# Altium PCB DUTBoard_NO_CAPS_2.PcbDoc (part 2 of 5)
Units mil, origin at the board's own origin, x right, y up, seen from the top; angles counter-clockwise.
Board outline 5475 x 5475 mil, 4 copper layers (Top Layer, Mid-Layer 1, Mid-Layer 2, Bottom Layer); 57 components, 471 nets, 1641 pads, 1025 vias.
Unrouted connection lines stored in the file: 1.
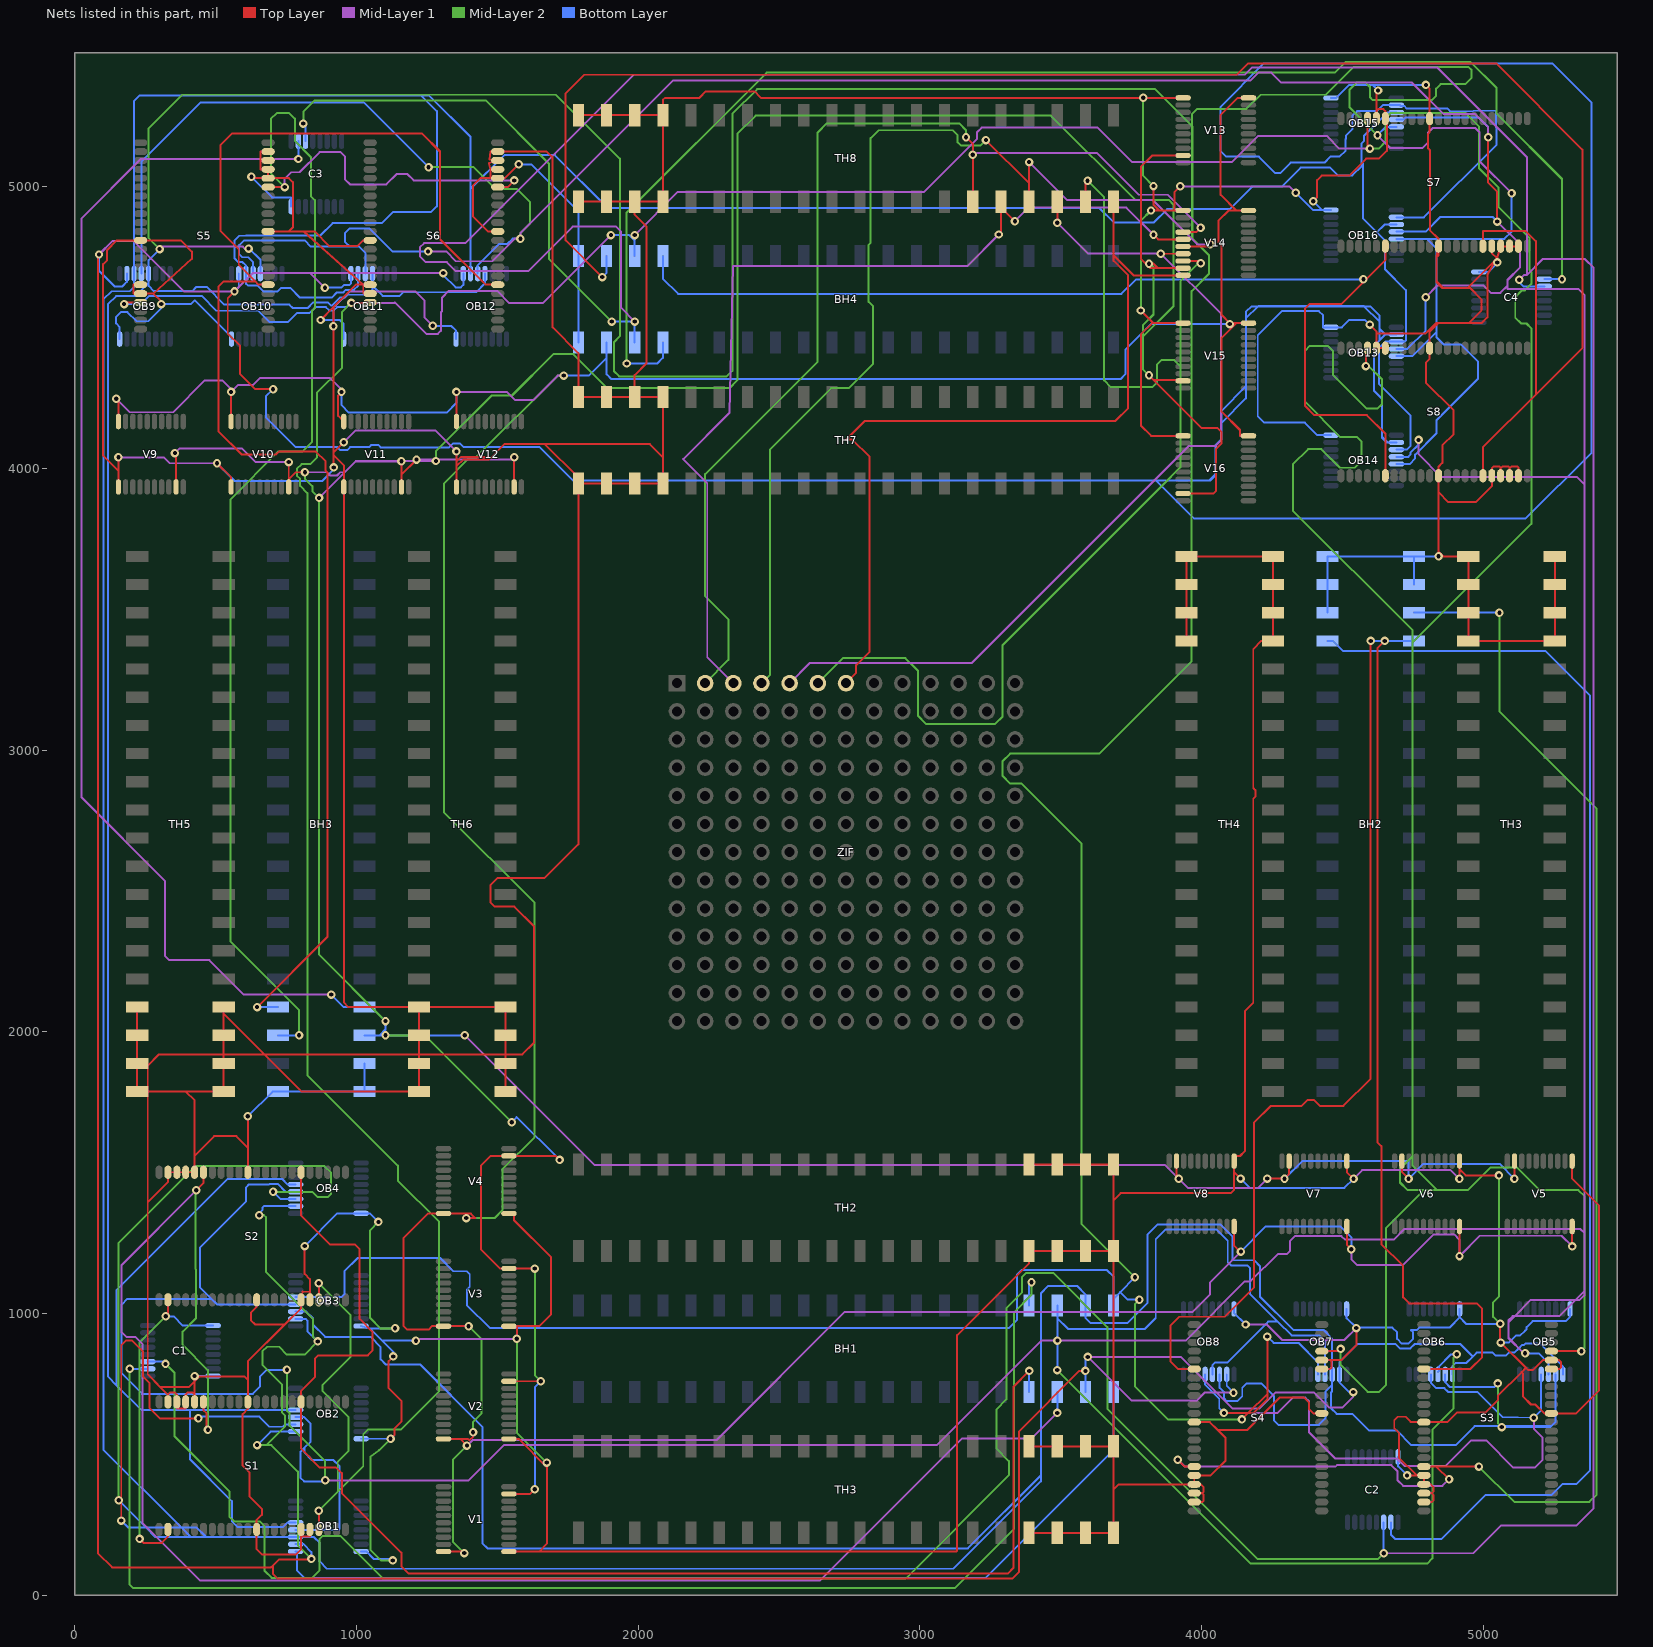
[diagram p4: the nets of this part, all layers, seen from the top]

## Via types
v1: diameter 30, hole 15, Top Layer to Bottom Layer, 1025 vias

## Nets (pads, with @x,y where several pads share a name; then routed paths per layer and width w, separated by ;. In a path a pad name is that pad's centre, name@x,y a point inside that pad or via, vN(x,y) a via of type N, cw(c..) or ccw(c..) an arc to the next point about the centre after c; other vN are vias at no path point) (continued)
ADDRD_B11: C1.ADDR11 S1.ADDR11 S2.ADDR11 | length 1213.7
  Top Layer w7: v1(230,200) 244,186 308.79,186 330.79,208 S1.ADDR11@330.79,233.62 ; v1(322.79,990) 330.79,998 S2.ADDR11@330.79,1048.62
  Mid-Layer 2 w7: v1(230,200) 230,897.21 v1(322.79,990)
  Bottom Layer w7: v1(322.79,990) 351.07,990 384,957.07 C1.ADDR11@491.14,957.07
CLK_1: BH4.17 C4.~CLK | length 4912.7
  Mid-Layer 2 w7: v1(1959,4372) 1959,4908 2455.5,5404.5 4472.84,5404.5 4510.34,5442 4955,5442 5047,5350 5047,5259 5279,5027 v1(5279,4671)
  Bottom Layer w7: v1(1959,4372) 2067.5,4372 2087.5,4392 BH4.17@2087.5,4446.46 ; C4.~CLK@5216.14,4671.48 5278.52,4671.48 v1(5279,4671)
CLK_2: BH3.17 C3.~CLK | length 4444.1
  Mid-Layer 1 w7: v1(794,5098) 235,5098 24.5,4887.5 24.5,2831.5 320,2536 320,2270 336,2254 478,2254 600,2132 v1(910,2132)
  Bottom Layer w7: C3.~CLK@793.52,5161.14 793.52,5098.48 v1(794,5098) ; v1(910,2132) 954.5,2087.5 BH3.17@1028.54,2087.5
CLK_3: BH2.17 C2.~CLK | length 4621.3
  Bottom Layer w7: BH2.17@4446.46,3387.5 4466,3387.5 4501.5,3352 5220,3352 5379,3193 5379,444 5329,394 5280,394 5241,355 5007,355 4851,199 4688,199 4671.48,215.52 C2.~CLK@4671.48,258.86
CLK_4: BH1.17 C1.~CLK | length 5047.8
  Mid-Layer 2 w7: v1(195,803.52) 195,38 208,25 3123,25 3333,235 3333,1003 3396,1066 v1(3396,1111)
  Bottom Layer w7: v1(195,803.52) C1.~CLK@258.86,803.52 ; BH1.17@3387.5,1028.54 3387.5,1102.5 v1(3396,1111)
CLR_COUNTER_W_U_COUNTER_WRP1: BH4.18 C1.CLR C2.CLR C3.CLR C4.CLR | length 20200.8
  Mid-Layer 1 w7: v1(1987.5,4521) 1939,4569.5 1939,4840.5 1921.5,4858 1767,4858 1609,4700 1353,4700 1321,4732 1245,4732 1225,4752 1225,4784 1240,4799 1386.4,4799 1984.4,5397 4153,5397 4178,5422 4837,5422 5154,5105 5154,4686 ; v1(4646,149) 4964,149 5063,248 5331,248 5391,308 5391,4712 5360,4743 5211,4743 5154,4686 ; v1(5127,4669) 5144,4686 5154,4686
  Mid-Layer 2 w7: v1(322,821) 354,789 354,564 549,369 549,279 566,262 657,262 674,245 674,86 698.5,61.5 842.5,61.5 869,88 869,200 880,211 943,211 1095,59 2949,59 3316,426 3316,476 3271,521 3271,659 3307,695 3307,1019 3362,1074 3362,1128 3378,1144 3473,1144 3665,952 3665,662 4198,129 4626,129 v1(4646,149) ; v1(811.11,5223.7) 811.11,5266.11 851,5306 1459,5306 1683,5082 1683,4744 v1(1906,4521)
  Bottom Layer w7: C1.CLR@258.86,829.11 313.89,829.11 v1(322,821) ; v1(811.11,5223.7) 819.11,5215.7 C3.CLR@819.11,5161.14 ; v1(1906,4521) v1(1987.5,4521) BH4.18@1987.5,4446.46 ; C2.CLR@4645.89,258.86 4645.89,149.11 v1(4646,149) ; v1(5127,4669) 5127,4661 5128,4660 5142.11,4645.89 C4.CLR@5216.14,4645.89
EN: BH4.19 V1.EN V2.EN V3.EN V4.EN V5.EN V6.EN V7.EN V8.EN V9.EN V10.EN V11.EN V12.EN V13.EN V14.EN V15.EN V16.EN | length 16813.4
  Top Layer w7: v1(147,4247) 154.84,4239.16 V9.EN@154.84,4166.14 ; V10.EN@554.84,4166.14 v1(554.84,4271.02) ; v1(946.84,4271.02) 948,4271.02 935,4258.02 935,4185.98 V11.EN@954.84,4166.14 ; V1.EN@1308.86,154.84 1377.16,154.84 v1(1382.53,149.47) ; V2.EN@1308.86,554.84 1368.16,554.84 ; V12.EN@1354.84,4166.14 v1(1354.84,4271.02) ; v1(1389.74,1338.84) 1421.74,1338.84 1405.74,1354.84 V4.EN@1308.86,1354.84 1253,1354.84 1166,1267.84 1166,956.5 1179.5,943 1255.9,943 1267.74,954.84 V3.EN@1308.86,954.84 v1(1398,954.84) ; v1(1392,531) 1368.16,554.84 ; v1(1413.74,578.84) 1413.74,563 1400.24,549.5 1394.9,554.84 1368.16,554.84 ; v1(4100,4512) v1@4103.16,4515.16 ; V8.EN@4115.16,1308.86 4115.16,1240 4135.18,1219.98 v1(4139.16,1219.98) ; V16.EN@4166.14,4115.16 4136,4115.16 4136,4136 4071,4201 4071,4464 4122.16,4515.16 ; V15.EN@4166.14,4515.16 4122.16,4515.16 ; V14.EN@4166.14,4915.16 4122.84,4915.16 ; V13.EN@4166.14,5315.16 4128.16,5315.16 4067.24,5254.24 4067.24,4970.76 4122.84,4915.16 ; V7.EN@4515.16,1308.86 4515.16,1243.98 v1(4531.16,1227.98) ; v1(4915.16,1203.98) V6.EN@4915.16,1308.86 ; v1(5315.16,1238) V5.EN@5315.16,1308.86 ; v1@4103.16,4515.16 4100,4515.16 4071,4544.16 4071,4791 4059,4803 4059,4878.16 4096,4915.16 4122.84,4915.16 ; v1@4103.16,4515.16 4122.16,4515.16
  Mid-Layer 1 w7: v1(147,4247) 195,4199 349,4199 462,4312 522.84,4312 554.84,4280 v1(554.84,4271.02) 579.82,4296 633,4296 658,4321 904.87,4321 954.84,4271.02 v1(946.84,4271.02) ; v1(1354.84,4271.02) 1533.98,4271.02 1563,4242 1627,4242 1714,4329 v1(1736,4329) ; v1(1392,531) 1412,551 2278.45,551 2733.45,1006 3968.03,1006 4030,1067.97 4030,1110.82 v1(4139.16,1219.98) ; v1(4531.16,1227.98) 4531.16,1192 4551.65,1171.51 4714.51,1171.51 4823.84,1280.84 4896,1280.84 4915.16,1261.68 v1(4915.16,1203.98) 4987.18,1276 5277.16,1276 v1(5315.16,1238)
  Mid-Layer 2 w7: v1(1382.53,149.47) 1342,190 1342,481 v1(1392,531) ; v1(1389.74,1338.84) 1489.84,1338.84 1519,1368 1519,1513 1632,1626 1632,2458 1310,2780 1310,3946 1401,4037 1422,4037 1714,4329 v1(1736,4329) ; v1(1398,954.84) 1443,909.84 1443,644.59 1414,615.59 1414,579.1 v1(1413.74,578.84)
  Bottom Layer w7: v1(946.84,4271.02) 946.84,4224 972.84,4198 1321,4198 1354.84,4231.84 v1(1354.84,4271.02) ; v1(1736,4329) 1824.5,4329 1887.5,4392 ; BH4.19@1887.5,4446.46 1887.5,4392 ; v1(4100,4512) 3820,4512 3729,4421 3729,4334 3712,4317 1904,4317 1887.5,4333.5 1887.5,4392 ; v1(4139.16,1219.98) 4228.18,1309 4492,1309 4531.16,1269.84 v1(4531.16,1227.98)
FPGA_Q: BH1.21 OB1.Q | length 3375.7
  Bottom Layer w7: OB1.Q@783.86,155.43 788.63,155.43 788.63,88.37 816,61 3232,61 3687.5,516.5 BH1.21@3687.5,721.46
FPGA_SHCP: BH1.19 OB1.SHCP OB2.SHCP OB3.SHCP OB4.SHCP OB5.SHCP OB6.SHCP OB7.SHCP OB8.SHCP OB9.SHCP OB10.SHCP OB11.SHCP OB12.SHCP OB13.SHCP OB14.SHCP OB15.SHCP OB16.SHCP | length 29898.4
  Top Layer w7: v1(165,265) 165,888 182,905 202.9,905 242,865.9 242,776.75 265,753.75 265,665 302,628 v1(439,628)
  Mid-Layer 2 w7: v1(156,337) 156,1251 428,1523 886,1523 910,1499 910,1425 898,1413 862,1413 843,1432 v1(704,1432) ; v1(5051,752) 5051,611 v1(5065,597)
  Bottom Layer w7: v1(156,337) 252,241 ; v1(165,265) 189,241 252,241 ; v1(439,628) 445,634 655,634 690.98,598.02 739,598.02 747.59,606.61 OB2.SHCP@783.86,606.61 ; v1(704,1432) 729.39,1406.61 OB4.SHCP@783.86,1406.61 ; OB3.SHCP@783.86,1006.61 822.39,1006.61 845,984 845,961 889,917 1050,917 1086,881 1086,837 1104,819 1226,819 1447,598 1447,184 1465,166 3170,166 3429,425 ; OB11.SHCP@1005.61,4691.14 1005.61,4648 990.7,4633.08 961.96,4633.08 953.01,4624.13 929.63,4624.13 911.5,4606 799.5,4606 764.72,4640.78 733.2,4640.78 720.42,4628 669.03,4628 647.75,4649.28 614.33,4649.28 607.61,4656 OB10.SHCP@607.61,4691.14 607.61,4720 595.41,4732.2 580.8,4732.2 566.5,4746.5 566.5,4808 584,4825.5 607.55,4825.5 608.5,4826.45 872,4826.45 915.55,4870 1090,4870 1129,4909 1264,4909 1285,4930 1285,5268 1230,5323 ; OB12.SHCP@1404.61,4691.14 1404.61,4991.61 ; OB8.SHCP@4063.39,783.86 4063.39,736.19 4079.39,720.18 4079.39,698.61 4089,689 4127,689 4144,706 4144,736 4160,752 4212,752 4256,708 4256,621 4272,605 4416,605 4439,628 4439,722 4463.39,746.39 ; OB14.SHCP@4691.14,4066.39 4727.86,4066.39 4741.5,4080.02 4741.5,4112.81 4742,4113.31 4742,4186.5 4629,4299.5 4629,4426 4652.39,4449.39 OB13.SHCP@4691.14,4449.39 4720,4449.39 4725,4454.39 4725,4632.5 4650,4707.5 4650,4809 4621.5,4837.5 ; OB16.SHCP@4691.14,4865.39 4649.39,4865.39 4621.5,4837.5 ; OB15.SHCP@4691.14,5263.39 4659.73,5263.39 4575.9,5179.56 4575.9,5161.4 4568,5153.5 ; OB6.SHCP@4864.39,783.86 4864.39,756 4881.39,739 5038,739 v1(5051,752) ; v1(5065,597) 5237.39,597 5240.39,600 ; OB5.SHCP@5256.39,783.86 5256.39,616 5240.39,600 ; 252,241 377.61,241 ; 252,241 286.39,206.61 412,206.61 ; 377.61,241 432,241 466.39,206.61 ; 377.61,241 412,206.61 ; 377.61,241 101.5,517.11 101.5,4599.5 130.5,4628.5 195.5,4628.5 210.61,4643.61 OB9.SHCP@210.61,4691.14 210.61,5304 229.61,5323 1230,5323 ; 412,206.61 466.39,206.61 ; 466.39,206.61 OB1.SHCP@783.86,206.61 848,206.61 869,185.61 869,120 895,94 3119,94 3429,404 3429,425 ; 1230,5323 1258,5323 1404.61,5176.39 1404.61,4991.61 ; 1404.61,4991.61 1525,5112 1704,5112 1892,4924 3637,4924 3689,4872 3829,4872 3877,4920 4099,4920 4179,5000 4284.5,5000 4351.5,5067 4456.27,5067 4483.27,5040 4535,5040 4568,5073 4568,5088 ; 3429,425 3429,1071 3456,1098 3557.5,1098 3587.5,1068 BH1.19@3587.5,1028.54 3587.5,985 3606.5,966 3736.31,966 3807.5,1037.2 3807.5,1279.5 3844,1316 4066,1316 4110,1272 4110,1191.5 4112.5,1189 4186,1189 4207,1168 4207,1060 4325,942 4432.39,942 4463.39,911 OB7.SHCP@4463.39,783.86 4463.39,746.39 ; 4463.39,746.39 4463.39,724 4459,719.61 4459,664 4479,644 4534,644 4593,585 4691.7,585 4743.7,533 4902,533 4969,600 5240.39,600 ; 4568,5088 4572,5084 4572,4887 4621.5,4837.5 ; 4568,5088 4567,5089 4567,5152.5 4568,5153.5 ; 4568,5088 4568,5153.5
FPGA_STCP: BH1.18 OB1.STCP OB2.STCP OB3.STCP OB4.STCP OB5.STCP OB6.STCP OB7.STCP OB8.STCP OB9.STCP OB10.STCP OB11.STCP OB12.STCP OB13.STCP OB14.STCP OB15.STCP OB16.STCP | length 28267.8
  Top Layer w7: v1(5017,5175) 5017,5013.69 5049,4981.69 v1(5049,4876)
  Mid-Layer 1 w7: v1(889,408) 1398,408 1524,534 3061,534 3431,904 v1(3488,904) 3943,904 4153,1114 4173,1114 4271,1212 4303.5,1212 4313,1221.5 4313,1257 4331,1275 4496,1275 4509,1262 4681,1262 4719,1300 5344,1300 5358,1286 ; v1(1254,4770) 1318,4770 1353,4735 1482,4735 1562,4815 v1(1582,4815) 1582,4835 2124,5377 4174,5377 4201.5,5404.5 4247,5404.5 4282.5,5369 4613.7,5369 4614.2,5369.5 4745.97,5369.5 4858.47,5257 4971,5257 5017,5211 v1(5017,5175) ; v1(4770,4101) 4770,4049.91 4850.91,3969 5333,3969 5358,3944 ; v1(4795,4607) 4837,4649 5000.02,4649 5026.52,4622.5 5060,4622.5 5085.5,4648 ; v1(5049,4876) 5130,4795 5130,4713 5085.5,4668.5 5085.5,4648 ; v1(5148,858.7) 5143.3,858.7 5089,913 5089,969 ; 5085.5,4648 5085.5,4637 5337,4637 5358,4616 5358,3944 ; 5089,969 5111,991 ; 5089,969 5089,976 5104,991 5111,991 ; 5111,991 5270,991 5327,1048 ; 5111,991 5168,1048 5327,1048 ; 5327,1048 5358,1079 ; 5327,1048 5342,1048 5358,1064 5358,1079 ; 5358,1079 5358,1286 ; 5358,1286 5358,3944
  Mid-Layer 2 w7: v1(753,800) 753,655.35 762.5,645.85 762.5,601.5 889,475 v1(889,408) ; v1(1256,5069) 1416,5069 1493,4992 1569,4992 1615.5,4945.5 1615.5,4868.5 1582,4835 v1(1582,4815) ; v1(3487.5,799) 4174.5,112 4800,112 4819,131 4819,588 4894,663 4894,844 v1(4905,855)
  Bottom Layer w7: OB9.STCP@236.2,4691.14 236.2,5088.2 447,5299 1026,5299 v1(1256,5069) ; OB10.STCP@633.2,4691.14 633.2,4731.16 615.16,4749.2 594.3,4749.2 583.5,4760 583.5,4792 600,4808.5 629.5,4808.5 630,4809 816,4809 838,4787 977,4787 ; v1(753,800) 682,800 657,775 657,740 632,715 239,715 166,788 166,1031 187,1052 485,1052 ; OB1.STCP@783.86,232.2 936,232.2 940,236.2 940,458 918,480 842,480 815,507 815,523 ; OB2.STCP@783.86,632.2 813.8,632.2 837,609 837,545 815,523 ; OB3.STCP@783.86,1032.2 504.8,1032.2 485,1052 ; OB4.STCP@783.86,1432.2 748,1432.2 719.7,1460.5 692.2,1460.5 689.7,1458 618.5,1458 608,1447.5 608,1398 445,1235 445,1092 485,1052 ; v1(889,408) 889,404 814,404 802,416 802,510 815,523 ; OB11.STCP@1031.2,4691.14 1031.2,4764.8 1009,4787 977,4787 ; v1(1254,4770) 1127,4770 1045,4852 976,4852 959,4835 959,4805 977,4787 ; OB12.STCP@1430.2,4691.14 1430.2,4720 1507.2,4797 1536,4797 1554,4815 v1(1582,4815) ; v1(3487.5,799) v1@3487.5,904.5 ; BH1.18@3487.5,1028.54 3487.5,983.5 ; v1(3488,904) v1@3487.5,904.5 ; OB8.STCP@4037.8,783.86 4037.8,816.8 4046.5,825.5 4090.16,825.5 4235.66,971 4270,971 ; OB7.STCP@4437.8,783.86 4437.8,902.2 4418,922 4319,922 4270,971 ; OB14.STCP@4691.14,4040.8 4733.36,4040.8 4741,4048.44 4741,4055.48 4770,4084.48 v1(4770,4101) ; OB13.STCP@4691.14,4423.8 4729.8,4423.8 4795,4489 v1(4795,4607) ; OB16.STCP@4691.14,4839.8 4795.3,4839.8 4847.5,4892 5033,4892 v1(5049,4876) ; OB15.STCP@4691.14,5237.8 4716.08,5237.8 4723.28,5245 4983.5,5245 5017,5211.5 v1(5017,5175) ; OB6.STCP@4838.8,793 4841.54,795.74 4841.54,811.53 4885,855 v1(4905,855) ; v1(5148,858.7) 5196.1,858.7 5230.8,824 OB5.STCP@5230.8,783.86 ; v1@3487.5,904.5 3487.5,983.5 ; 3487.5,983.5 3526,945 3798,945 3837,984 3837,1264 3872,1299 4052,1299 4092.5,1258.5 4092.5,1182.66 4104,1171.16 4161,1171.16 4172.16,1160 4172.16,1068.84 4270,971
FPGA_~CS1: BH4.24 S7.~CS S8.~CS | length 3844.7
  Top Layer w7: v1(4574,4671) v1@4578.89,4666.11 ; S8.~CS@4651.77,3973.62 4651.77,4123.53 4586.3,4189 4399.19,4189 4367,4221.19 4367,4568 4383,4584 4496.77,4584 v1@4578.89,4666.11 ; S7.~CS@4651.77,4788.62 4651.77,4739 v1@4578.89,4666.11
  Bottom Layer w7: BH4.24@2087.5,4753.54 2087.5,4673.5 2142,4619 3715,4619 3767,4671 v1(4574,4671)
FPGA_~CS2: BH3.24 S5.~CS S6.~CS | length 5193.7
  Top Layer w7: v1(647,2087.5) 897,2337.5 897,3984.7 890.5,3991.2 890.5,4024.5 856,4059 724,4059 714,4049 591.96,4049 509.34,4131.62 509.34,4644.68 528,4663.34 640.43,4663.34 ; S5.~CS@686.38,4651.77 652,4651.77 640.43,4663.34 ; S6.~CS@1501.38,4651.77 1458.23,4651.77 1296.37,4813.63 1296.37,5124.63 1233,5188 558,5188 518,5148 518,4842 582,4778 582,4721.77 640.43,4663.34
  Bottom Layer w7: v1(647,2087.5) BH3.24@721.46,2087.5
FPGA_~CS3: BH2.24 S3.~CS S4.~CS | length 6435.6
  Top Layer w7: S4.~CS@3973.62,803.23 3915.77,803.23 3890,829 3890,958 3920.5,988.5 4082.5,988.5 4185.41,1091.41 4185.41,1676.41 4246,1737 4354.9,1737 4375.4,1757.5 4399.01,1757.5 4419.51,1737 4503,1737 4600,1834 v1(4600,3387.5) ; v1(4650,3387.5) 4623.34,3360.84 4623.34,1608.5 4638,1593.84 4638,1246.51 4715,1169.51 4715,1057 4736,1036 4976,1036 4995.5,1016.5 4995.5,844.5 4954.23,803.23 S3.~CS@4788.62,803.23
  Bottom Layer w7: v1(4600,3387.5) v1(4650,3387.5) BH2.24@4753.54,3387.5
FPGA_~CS4: BH1.24 S1.~CS S2.~CS | length 4933
  Top Layer w7: S2.~CS@803.23,1501.38 803.23,1347 905.23,1245 994,1245 1011,1228 1011,981.21 1056.42,935.79 1056.42,867.92 1040,851.5 864,851.5 852.5,840 852.5,774.5 803.23,725.23 S1.~CS@803.23,686.38 803.23,520 870.05,453.17 928,453.17 948,433.17 948,362 1159,151 1159,103 1185,77 3311,77 3332,98 3332,740 v1(3388,796)
  Bottom Layer w7: BH1.24@3387.5,721.46 3387.5,795.5 v1(3388,796)
FPGA_~MR: BH1.22 OB1.~MR OB2.~MR OB3.~MR OB4.~MR OB5.~MR OB6.~MR OB7.~MR OB8.~MR OB9.~MR OB10.~MR OB11.~MR OB12.~MR OB13.~MR OB14.~MR OB15.~MR OB16.~MR | length 29794.9
  Top Layer w7: v1(86,4759) 82,4755 82,149 132.5,98.5 696.5,98.5 703,105 ; v1(567,4628) 543,4604 543,4478.29 587,4434.29 587,4334 640,4281 v1(704,4281) ; v1(840,129) 837,126 724,126 703,105 ; v1(3587.5,796) 3566,796 3352,582 3352,84 3327,59 721,59 703,77 703,105
  Mid-Layer 1 w7: v1(86,4759) 134,4807 208,4807 387,4628 v1(567,4628) 632,4693 ; v1(888,4641.13) 836.13,4693 ; v1(1308.08,4693) 836.13,4693 ; v1(4113,719) 4053,719 ; v1(4538,721) 4538,705 4498.99,665.99 4452.31,665.99 4399.3,719 4261.54,719 4205.77,663.23 4108.77,663.23 4053,719 ; 632,4693 836.13,4693 ; 632,4693 632.5,4693.5 835.63,4693.5 836.13,4693 ; 4053,719 3926,846 v1(3596,846) 3751,691 3982,691 4010,719 4053,719
  Mid-Layer 2 w7: v1(647,533) 679.98,533 ; v1(654.98,1349.02) 670.98,1349.02 678.98,1341.02 678.98,1147.02 845.22,980.78 845.22,918.23 v1(862.42,901.02) 815.66,854.27 752.76,854.27 725.03,882 682.5,882 666,865.5 666,817.74 736,747.74 736,648.31 745.5,638.81 745.5,598.52 679.98,533 ; v1(840,129) 792,177 792,439 698,533 679.98,533
  Bottom Layer w7: v1(86,4759) 86,4701 141,4646 169.34,4646 185.02,4661.68 OB9.~MR@185.02,4691.14 ; v1(567,4628) 582.02,4643.02 OB10.~MR@582.02,4691.14 ; v1(647,533) 695.02,581.02 OB2.~MR@783.86,581.02 ; v1(654.98,1349.02) 654.98,1356 666.96,1367.99 666.96,1377.01 670.98,1381.02 OB4.~MR@783.86,1381.02 ; v1(704,4281) 678,4255 678,4181 783,4076 931.38,4076 943.04,4064.34 966.65,4064.34 977.19,4074.89 1044.58,4074.89 1053.2,4083.5 1076.81,4083.5 1085.81,4074.5 1328.88,4074.5 1343.04,4088.66 1366.65,4088.66 1380.22,4075.08 1446.6,4075.08 1447.52,4076 1649,4076 1768,3957 3837,3957 ; OB1.~MR@783.86,181.02 812,181.02 840,153.02 v1(840,129) ; OB3.~MR@783.86,981.02 819.98,981.02 826,975 826,937.44 v1(862.42,901.02) ; v1(888,4641.13) 945.97,4641.13 954.91,4650.08 975,4650.08 980.02,4655.11 OB11.~MR@980.02,4691.14 ; v1(1308.08,4693) 1308.08,4685.97 1351.56,4642.49 1370.49,4642.49 1379.02,4651.02 OB12.~MR@1379.02,4691.14 ; BH1.22@3587.5,721.46 v1(3587.5,796) 3587.5,837.5 v1(3596,846) ; OB8.~MR@4088.98,783.86 4088.98,743.02 v1(4113,719) ; 4157,4291 4071,4205 4071,4162 ; 4157,4532 4201,4576 4576,4576 4632,4520 4632,4494.55 ; v1(4538,721) 4523.98,721 4488.98,756 OB7.~MR@4488.98,783.86 4488.98,826.98 4554.5,892.5 4686.87,892.5 4703.15,876.22 4740.85,876.22 4757.13,892.5 4916.89,892.5 4962,847.39 4962,847 ; 4612,4275 4640,4247 4640,4111.98 4660,4091.98 OB14.~MR@4691.14,4091.98 4656,4091.98 4639.5,4108.48 4639.5,4247 4612,4274.5 4612,4435.4 4651.57,4474.98 ; 4612,4435 4632,4455 4632,4494.55 ; OB13.~MR@4691.14,4474.98 4651.57,4474.98 ; OB16.~MR@4691.14,4890.98 4788.68,4890.98 5047,5149.3 5045.5,5270.5 4882.24,5267 4872.74,5276.5 4728.55,5276.5 4718.82,5286.24 4705.89,5286.24 4703.15,5288.98 OB15.~MR@4691.14,5288.98 4643,5288.98 4622.02,5268 4552,5268 4535.25,5251.25 4535.25,5203.56 4511.5,5179.81 4511.5,5169.61 4511,5169.61 4511,5128 4489,5106 4457,5106 4436,5085 4316,5085 4279,5048 4261,5048 4203,5106 4088,5106 4066,5128 4066,5282 4221,5437 5245,5437 5384,5298 5384,4056 5150,3822 3972,3822 3837,3957 ; OB6.~MR@4889.98,783.86 4889.98,812.48 4902.42,824.92 4939.92,824.92 4962,847 ; OB5.~MR@5281.98,783.86 5281.98,812.82 5200.79,894 5150.39,894 5143.89,887.5 5136.5,887.5 5124.5,875.5 5110,861 5090.35,861 5080.44,851.1 5042.75,851.1 5032.85,861 4976,861 4962,847 ; 3837,3957 4032,3957 4050,3975 4050,4083 ; 3837,3957 4027,3957 4049,3979 4049,4082 4050,4083 ; 4050,4083 4071,4104 4071,4162 ; 4071,4162 4157,4248 4157,4555 4177,4575 4599,4575 4632,4542 4632,4494.55 ; 4632,4494.55 4651.57,4474.98
FPGA_~OE: BH4.23 S1.~OE S2.~OE S3.~OE S4.~OE S5.~OE S6.~OE S7.~OE S8.~OE | length 20773.4
  Top Layer w7: v1(175,4583) 175,4588.56 175.22,4588.78 S5.~OE@233.62,4588.78 ; v1(866,300) 866.22,299.78 S1.~OE@866.22,233.62 ; S2.~OE@866.22,1048.62 v1(866.22,1107.24) ; v1(982,4587) 1046.84,4587 S6.~OE@1048.62,4588.78 ; S4.~OE@4426.38,866.22 4485,866.22 v1(4493,874.22) ; v1(4583,4363) 4583.09,4363.09 4583.09,4420.69 S8.~OE@4588.78,4426.38 ; S7.~OE@4588.78,5241.38 4588.78,5143.22 v1(4597,5135) ; S3.~OE@5241.38,866.22 5347.78,866.22 v1(5348,866)
  Mid-Layer 1 w7: v1(982,4587) 1134.63,4587 1136.41,4588.78 1248.19,4477 1288.5,4477 1299.5,4488 1299.5,4553.5 1303,4557 1303,4604.5 1328,4629.5 1499.21,4629.5 1542.71,4586 1661,4586 v1(1903,4828) ; v1(1988,4828) 2141,4981 3015,4981 3202,5168 3202,5192 3219,5209 3631,5209 3753,5087 4107,5087 4199,5179 4445,5179 4489,5135 v1(4597,5135)
  Mid-Layer 2 w7: v1(866,300) 933.5,367.5 ; v1(866.22,1107.24) 978.5,994.96 978.5,845.08 880,746.58 880,724 972,632 972,513 933.5,474.5 933.5,367.5 ; v1(982,4587) 980.22,4587 948,4554.78 948,4356 859.5,4267.5 859.5,4037.5 836.5,4014.5 805.2,4014.5 788.5,3997.81 788.5,3974.2 800,3962.7 800,3937.96 826,3911.96 826,1846 1147,1525 1147,1472 1293,1326 1293,724 1157,588 1040,588 1024,572 1024,458 933.5,367.5 ; v1(4493,874.22) 4493,818 4589,722 4629.5,722 4655,747.5 4655,803.83 4654,804.83 4654,856.6 4655,857.6 4655,1304 4790,1439 ; v1(4583,4363) 4593.54,4363 4640,4316.54 4640,4227.5 4624,4211.5 4586.44,4211.5 4466,4331.94 4466,4417 4448,4435 4384,4435 4367,4418 4367,4236 4492,4111 4551.5,4111 4567,4095.5 4567,4025 4544,4002 4491,4002 4424.5,4068.5 4378.2,4068.5 4324,4014.31 4324,3850 4749,3425 4749,3382 ; v1(4597,5135) 4628,5135 4652.5,5159.5 4652.5,5242.5 4672,5262 4936,5262 4984,5214 4984,5066 5053,4997 5053,4928 5164,4817 5164,4704 5170.5,4697.5 5170.5,4655 5147.5,4632 5137,4632 5113,4608 5113,4535 5134,4514 5153,4514 5170,4497 5170,3803 4749,3382 ; v1(5348,866) 5359,877 5359,1416 5337,1438 5200,1438 5119,1519 5026,1519 4946,1439 4835,1439 ; 4749,1559 4749,1525 4835,1439 ; 4749,1559 4749,3382 ; 4749,1559 4704,1514 4704,1465 4730,1439 4790,1439 ; 4790,1439 4835,1439
  Bottom Layer w7: v1(175,4583) 236,4583 265,4612 450,4612 502.72,4559.28 651.22,4559.28 691.5,4519 756,4519 789,4552 833.68,4552 853.65,4571.98 891.35,4571.98 902.85,4560.48 919.69,4560.48 931.22,4572 965.22,4572 980.22,4587 v1(982,4587) ; v1(1903,4828) 1968,4828 1987.5,4808.5 ; BH4.23@1987.5,4753.54 1987.5,4808.5 ; v1(1988,4828) 1987.5,4827.5 1987.5,4808.5
FPGA_~PL: BH1.20 OB1.~PL OB2.~PL OB3.~PL OB4.~PL OB5.~PL OB6.~PL OB7.~PL OB8.~PL OB9.~PL OB10.~PL OB11.~PL OB12.~PL OB13.~PL OB14.~PL OB15.~PL OB16.~PL | length 31827
  Top Layer w7: v1(4079,647) 4166,647 ; v1(4143,624) 4166,647 ; v1(4233,918) 4233,714 ; 4166,647 4233,714 ; 4166,647 4184.68,647 4233,695.32 4233,714
  Mid-Layer 1 w7: v1(301,4778) 310,4787 597,4787 609,4775 614,4780 v1(617,4780) ; v1(4079,647) 4080,646 4268,646 4323.5,701.5 4368,701.5 4381,688.5 4381,579 4475,485 4693,485 4720,458 4865,458 4957,550 5009.5,550 5106.5,453 5183,453 5210.5,480.5 5210.5,559.5 5179,591 v1(5179,630) ; v1(4624,5182) 4668.5,5137.5 4784,5137.5 4804,5157.5 4804,5192 4820,5208 4971,5208 4987,5192 4987,5089 v1(5100,4976)
  Mid-Layer 2 w7: v1(301,4778) 262,4817 262,5207 381,5326 1708,5326 1935,5099 1935,4469 1914,4448 1914,4344 1932,4326 2314,4326 2334,4346 2334,5258 2422,5346 3835,5346 3966,5215 ; v1(3763,1128.5) 3574,1317.5 3574,2482 3574,2667 3359,2882 3319,2882 3293,2908 3293,2960 3320,2987 3636,2987 3737,3088 3964,3315 3964,4629 4026,4691 4026,4757 3967,4816 ; v1(3779,1049) 3763,1033 3763,741 3880,624 v1(4143,624) ; v1(4624,5182) 4525.28,5280.72 4525.28,5344.63 4549.61,5368.96 4582.04,5368.96 4597.5,5353.5 4597.5,5317.5 4608,5307 4816,5307 4832,5323 4832,5348 4848,5364 4936,5364 4957,5385 4957,5415 4947,5425 4539,5425 4440,5326 4209,5326 4159,5276 3984,5276 3966,5258 3966,5215 ; 3966,5215 3966,4817 3967,4816 ; 3966,5215 3967,5214 3967,4816
  Bottom Layer w7: v1(301,4778) 261.8,4738.8 OB9.~PL@261.8,4691.14 261.8,4658.8 ; v1(617,4780) 620,4780 658.8,4741.2 OB10.~PL@658.8,4691.14 ; OB1.~PL@783.86,257.8 754.8,257.8 740,243 577,243 558,262 558,334 409,483 409,655 411.8,657.8 ; OB2.~PL@783.86,657.8 411.8,657.8 ; OB3.~PL@783.86,1057.8 945.8,1057.8 958,1070 958,1150.99 1004.01,1197 1297,1197 1344,1150 1392,1150 1402,1140 1402,1095 1392,1085 1392,1030 1474,948 3316,948 3344,976 3344,1138 3360,1154 3664,1154 3687.5,1130.5 BH1.20@3687.5,1053 ; OB4.~PL@783.86,1457.8 755.2,1457.8 735.5,1477.5 542.5,1477.5 148,1083 148,746 ; OB11.~PL@1056.8,4691.14 1056.8,4648 ; OB12.~PL@1455.8,4691.14 1455.8,4656 1424.8,4625 1166.03,4625 1153.03,4612 1092.8,4612 1056.8,4648 ; BH1.20@3687.5,1028.54 BH1.20@3687.5,1053 ; v1(3763,1128.5) 3710.5,1076 ; v1(3779,1049) 3737.5,1049 3710.5,1076 ; OB8.~PL@4012.2,783.86 4012.2,747.32 4062.39,697.14 4062.39,663.61 v1(4079,647) ; v1(4233,918) 4255.5,895.5 4343.7,895.5 4412.2,827 OB7.~PL@4412.2,783.86 ; v1(4624,5182) 4654.2,5212.2 OB15.~PL@4691.14,5212.2 ; OB14.~PL@4691.14,4015.2 4738.22,4015.2 4758,4034.98 4758,4048.44 4833.5,4123.94 4833.5,4170.09 4980.5,4317.09 4980.5,4379.5 4920,4440 4858.37,4440 4834,4464.37 4834,4485.2 ; OB13.~PL@4691.14,4398.2 4747,4398.2 4834,4485.2 ; OB16.~PL@4691.14,4814.2 4799,4814.2 ; OB6.~PL@4813.2,783.86 4813.2,753.8 4832,735 4861.34,735 4874.34,722 4978.5,722 5068.5,632 v1(5179,630) 5205.2,656.2 OB5.~PL@5205.2,783.86 ; v1(5100,4976) 5100,4840 5074.2,4814.2 4799,4814.2 ; 148,746 236.2,657.8 411.8,657.8 ; 148,746 118.5,775.5 118.5,4583.5 146.5,4611.5 214.5,4611.5 261.8,4658.8 ; 261.8,4658.8 261.8,4647.55 280.34,4629 417.04,4629 432.04,4644 468,4644 531,4581 761.37,4581 773.37,4569 826.63,4569 846.61,4588.98 898.39,4588.98 909.89,4577.48 912.65,4577.48 942.31,4607.13 960.05,4607.13 969,4616.08 1038.8,4616.08 1056.8,4634.08 1056.8,4648 ; BH1.20@3687.5,1053 3710.5,1076 ; 4799,4814.2 4834,4779.2 4834,4485.2
FPGA_~WE1: BH4.22 S7.~WE S8.~WE | length 6670.3
  Top Layer w7: v1(1872,4679) 1742,4809 1742,5331 1808,5397 4125,5397 4165,5437 5045,5437 5351,5131 5351,4426.77 5186,4261.77 ; S8.~WE@4998.23,3973.62 4998.23,4074 5186,4261.77 ; S7.~WE@4998.23,4788.62 4998.23,4842 5150.14,4842 5186,4806.14 5186,4261.77
  Bottom Layer w7: v1(1872,4679) 1887.5,4694.5 BH4.22@1887.5,4753.54
FPGA_~WE2: BH3.23 S5.~WE S6.~WE | length 5125.5
  Top Layer w7: S5.~WE@686.38,4998.23 v1(745,4998.23) ; S6.~WE@1501.38,4998.23 1536.23,4998.23 v1(1560,5022)
  Mid-Layer 1 w7: v1(745,4998.23) 745,5027.89 768,5050.89 797.66,5050.89 868.77,5122 944,5122 960,5106 960,5025 977,5008 1106,5008 1142,5044 1181,5044 1203,5022 v1(1560,5022)
  Mid-Layer 2 w7: v1(745,4998.23) 696,5047.23 696,5240 717,5261 761,5261 781,5241 781,5162 838,5105 838,4966 852,4952 852,4569 842.5,4559.5 842.5,4093.5 809,4060 723,4060 553,3890 553,2320 796,2077 v1(796,1988)
  Bottom Layer w7: BH3.23@721.46,1987.5 795.5,1987.5 v1(796,1988)
FPGA_~WE3: BH2.23 S3.~WE S4.~WE | length 5418.9
  Top Layer w7: v1(3915,481) 3939.23,456.77 S4.~WE@3973.62,456.77 ; S3.~WE@4788.62,456.77 4833.23,456.77 ; v1(4878,412) 4833.23,456.77 ; v1(4984,456.77) 4833.23,456.77
  Mid-Layer 1 w7: v1(3915,481) 3939,457 4475.72,457 4480.5,461.78 4673.22,461.78 4695,440 4695,408 4715,388 4854,388 v1(4878,412)
  Mid-Layer 2 w7: v1(4984,456.77) 5109.54,331.23 5376,331.23 5402,357.23 5402,2792 5057,3137 v1(5057,3487.5)
  Bottom Layer w7: BH2.23@4753.54,3487.5 v1(5057,3487.5)
FPGA_~WE4: BH1.23 S1.~WE S2.~WE | length 6081
  Top Layer w7: v1(431,1437.23) 456.77,1463 S2.~WE@456.77,1501.38 ; S1.~WE@456.77,686.38 456.77,656.5 468,645.27 468,592.53 v1(472.77,587.76)
  Mid-Layer 1 w7: v1(431,1437.23) 166,1172.23 166,934 184.2,915.8 216.2,915.8 240,892 240,257 444,53 2646,53 3150,557 3397.5,557 v1(3487.5,647)
  Mid-Layer 2 w7: v1(431,1437.23) 428,1434.23 428,1158.19 431,1155.19 431,984 383,936 383,889 472.77,799.23 v1(472.77,587.76)
  Bottom Layer w7: v1(3487.5,647) BH1.23@3487.5,721.46
GLOBAL_HIGH_POWER: BH3.18 V1.VCC V2.VCC V3.VCC V4.VCC V5.VCC V6.VCC V7.VCC V8.VCC V9.VCC V10.VCC V11.VCC V12.VCC V13.VCC V14.VCC V15.VCC V16.VCC | length 17913.2
  Top Layer w7: v1(355.57,4054) 359.57,4050 V9.VCC@359.57,3933.86 ; V10.VCC@759.57,3933.86 759.57,3961.57 ; v1(759.57,4022) 759.57,3961.57 ; v1(817,3986) 784,3986 759.57,3961.57 ; V11.VCC@1159.57,3933.86 1159.57,3977.57 ; v1(1159.57,4025) 1159.57,3977.57 ; v1(1213,4031) 1159.57,3977.57 ; V1.VCC@1541.14,359.57 1616.57,359.57 v1(1633,376) ; V2.VCC@1541.14,759.57 v1(1654.02,759.57) ; V12.VCC@1559.57,3933.86 v1(1559.57,4039) ; v1(1633,1159.57) V3.VCC@1541.14,1159.57 1510,1159.57 1442.5,1227.07 1442.5,1526.02 1476.04,1559.57 V4.VCC@1541.14,1559.57 1706.43,1559.57 v1(1721,1545) ; v1(3813,4330) 3829.83,4313.17 ; v1(3812.98,4726.43) 3828.98,4726.43 3844.98,4710.43 ; V8.VCC@3910.43,1541.14 3910.43,1486.58 v1(3918.43,1478.58) ; V16.VCC@3933.86,3910.43 4041.43,3910.43 4051,3920 4051,4069.5 4071,4089.5 4071,4128 4056.5,4142.5 4000.5,4142.5 3829.83,4313.17 ; V15.VCC@3933.86,4310.43 3931.12,4313.17 3829.83,4313.17 ; V14.VCC@3933.86,4710.43 3844.98,4710.43 ; V13.VCC@3933.86,5110.43 3824,5110.43 3784.48,5070.91 3784.48,4743.52 3817.57,4710.43 3844.98,4710.43 ; v1(4233,1479) v1@4294,1479 ; v1(4294,1478) v1@4294,1479 ; V7.VCC@4310.43,1541.14 4310.43,1495.43 v1@4294,1479 ; V6.VCC@4710.43,1541.14 4710.43,1502.58 v1(4734.43,1478.58) ; v1(5110,1478.43) 5110.43,1478.87 V5.VCC@5110.43,1541.14
  Mid-Layer 1 w7: v1(355.57,4054) 372.57,4071 593,4071 642,4022 v1(759.57,4022) ; v1(817,3986) 895.7,3986 907.2,3974.5 930.81,3974.5 942.31,3986 958,3986 ; v1(867,3895) 958,3986 ; v1(1159.57,4025) 997,4025 ; v1(1213,4031) 1551.57,4031 v1(1559.57,4039) ; v1(1282,4026) 998,4026 997,4025 ; v1(1384.5,1987.5) 1845,1527 3870.02,1527 v1(3918.43,1478.58) 3951.02,1446 4200,1446 v1(4233,1479) ; 958,3986 997,4025
  Mid-Layer 2 w7: v1(817,3986) 817,3963 843,3937 843,3919 v1(867,3895) 867,2274 v1(1103,2038) ; v1(1102.91,1987.5) 1242.5,1987.5 1532.75,1697.25 v1(1550.75,1679.25) ; v1(1282,4026) 1282,4060 1480.52,4258.52 1552,4258.52 1698.48,4405 1770,4405 1890,4285 2324,4285 2352,4313 2352,5187 2417,5252 3465,5252 3764,4953 3883,4953 3900,4936 3900,4576 3792.5,4468.5 ; v1(1633,1159.57) 1633,780.59 v1(1654.02,759.57) ; v1(3813,4330) 3792.5,4350.5 3792.5,4468.5 ; v1(3812.98,4726.43) 3816,4726.43 3828.98,4713.46 3828.98,4545.98 3792.5,4509.5 3792.5,4468.5
  Bottom Layer w7: BH3.18@1028.54,1987.5 1082.5,1987.5 ; v1(1103,2038) 1103,2008 1082.5,1987.5 ; v1(1384.5,1987.5) v1(1102.91,1987.5) 1082.5,1987.5 ; v1(1550.75,1679.25) 1568.75,1697.25 v1(1721,1545) ; v1(1633,376) 1633,738.55 v1(1654.02,759.57) ; v1(4294,1478) 4357,1541 4734.43,1541 v1(4734.43,1478.58) 4786.85,1531 5057.43,1531 v1(5110,1478.43)
GND: BH2.18 BH2.19 BH2.20 BH2.21 BH2.22 BH3.19 BH3.20 BH3.21 BH4.20 BH4.21 C1.GND C2.GND C3.GND C4.GND OB1.GND OB2.GND OB3.GND OB4.GND OB5.GND OB6.GND OB7.GND OB8.GND OB9.GND OB10.GND OB11.GND OB12.GND OB13.GND OB14.GND OB15.GND OB16.GND S1.ADDR12 S1.ADDR13 S1.ADDR14 S1.ADDR15 S1.VSS S1.~BHE S1.~BLE S2.ADDR12 S2.ADDR13 S2.ADDR14 S2.ADDR15 S2.VSS S2.~BHE S2.~BLE S3.ADDR12 S3.ADDR13 S3.ADDR14 S3.ADDR15 S3.VSS S3.~BHE S3.~BLE S4.ADDR12 S4.ADDR13 S4.ADDR14 S4.ADDR15 S4.VSS S4.~BHE S4.~BLE S5.ADDR12 S5.ADDR13 S5.ADDR14 S5.ADDR15 S5.VSS S5.~BHE S5.~BLE S6.ADDR12 S6.ADDR13 S6.ADDR14 S6.ADDR15 S6.VSS S6.~BHE S6.~BLE S7.ADDR12 S7.ADDR13 S7.ADDR14 S7.ADDR15 S7.VSS S7.~BHE S7.~BLE S8.ADDR12 S8.ADDR13 S8.ADDR14 S8.ADDR15 S8.VSS S8.~BHE S8.~BLE TH2.17 TH2.18 TH2.19 TH2.20 TH2.21 TH2.22 TH2.23 TH2.24 TH3.17 TH3.18 TH3.19 TH3.20 TH3.21 TH3.22 TH3.23 TH3.24 TH4.17 TH4.18 TH4.19 TH4.20 TH4.21 TH4.22 TH4.23 TH4.24 TH5.17 TH5.18 TH5.19 TH5.20 TH5.21 TH5.22 TH5.23 TH5.24 TH6.17 TH6.18 TH6.19 TH6.20 TH6.21 TH6.22 TH6.23 TH6.24 TH7.17 TH7.18 TH7.19 TH7.20 TH7.21 TH7.22 TH7.23 TH7.24 TH8.17 TH8.18 TH8.19 TH8.20 TH8.21 TH8.22 TH8.23 TH8.24 V1.GND V2.GND V3.GND V4.GND V5.GND V6.GND V7.GND V8.GND V9.GND V10.GND V11.GND V12.GND V13.GND V14.GND V15.GND V16.GND | length 59621.7
  Top Layer w7: V9.GND@154.84,3933.86 154.84,3991 ; v1(155,4039) 154.84,4038.84 154.84,3991 ; TH5.17@221.46,2087.5 TH5.18@221.46,1987.5 TH5.19@221.46,1887.5 TH5.20@221.46,1787.5 394,1787.5 ; S5.~BLE@233.62,4651.77 208,4651.77 208,4620.28 S5.~BHE@233.62,4620.28 279,4620.28 ; v1(307,4583) 307,4592.28 279,4620.28 ; S1.ADDR12@330.79,686.38 330.79,712 ; S1.ADDR15@425.28,686.38 425.28,712 ; v1(425.28,777.93) 425.28,712 ; v1(504.84,4018) 554.84,3968 V10.GND@554.84,3933.86 ; TH5.24@528.54,2087.5 528.54,2064 ; S2.VSS@614.25,1501.38 614.25,1588.5 ; v1(614.25,1699.75) 614.25,1588.5 ; v1(627,5035) 632.28,5029.72 S5.ADDR15@686.38,5029.72 ; S2.VSS@645.75,1048.62 645.75,1023.75 625.21,1003.21 625.21,976 640.21,961 745,961 ; S5.VSS@686.38,4840.75 760,4840.75 ; S5.ADDR13@686.38,5092.72 660,5092.72 ; S5.ADDR12@686.38,5124.21 660,5124.21 660,5092.72 ; S1.~BLE@803.23,233.62 803.23,208 ; v1(816,1239.16) 816,1141 834.72,1122.28 834.72,1076 ; S1.~BHE@834.72,233.62 834.72,208 803.23,208 ; S2.~BHE@834.72,1048.62 834.72,1076 ; v1(872.5,4526.48) 918,4571.98 ; v1(919,4003) 919,4046 ; v1(954.84,4092.84) 919,4057 919,4046 ; S6.~BHE@1048.62,4620.28 1024,4620.28 1024,4651.77 ; S6.~BLE@1048.62,4651.77 1024,4651.77 ; S6.VSS@1048.62,4809.25 1023.25,4809.25 1002.5,4788.5 903.25,4788.5 851,4840.75 811.92,4840.75 ; v1(1121.02,555.43) 1135.19,569.6 1135.19,592.19 1159,616 1159,690 1114.03,734.97 1114.03,831.03 v1(1130.58,847.58) ; v1(1354.84,4060.16) 1354.84,4024 ; S6.VSS@1501.38,4840.75 1466.49,4840.75 1413,4894.24 1413,5002.72 1440,5029.72 1476,5029.72 ; S6.ADDR14@1501.38,5061.22 1476,5061.22 ; TH6.21@1528.54,1787.5 TH6.22@1528.54,1887.5 1528.54,1920 ; V1.GND@1541.14,154.84 1648,154.84 ; V2.GND@1541.14,554.84 1575.16,554.84 1675,455 ; V3.GND@1541.14,954.84 1569,954.84 ; V4.GND@1541.14,1354.84 1559,1354.84 1559,1331 1691,1199 1691,997.84 1648,954.84 1569,954.84 ; v1(1569,910) 1569,954.84 ; v1(1575.75,5078.98) 1526.5,5029.72 S6.ADDR15@1501.38,5029.72 1476,5029.72 ; v1(1675,471) 1675,455 ; TH8.21@1787.5,4946.46 TH8.22@1887.5,4946.46 TH8.23@1987.5,4946.46 ; TH8.20@1787.5,5253.54 TH8.19@1887.5,5253.54 TH8.18@1987.5,5253.54 TH8.17@2087.5,5253.54 ; TH3.17@3387.5,221.46 TH3.18@3487.5,221.46 TH3.19@3587.5,221.46 TH3.20@3687.5,221.46 3687.5,376 ; TH3.24@3387.5,528.54 TH3.23@3487.5,528.54 TH3.22@3587.5,528.54 TH3.21@3687.5,528.54 ; TH2.24@3387.5,1528.54 TH2.23@3487.5,1528.54 TH2.22@3587.5,1528.54 TH2.21@3687.5,1528.54 3687.5,1402.5 ; v1(3784,4560.16) 3829,4515.16 ; v1(3820.16,4915.16) 3849.84,4915.16 ; v1(3829,5002) 3829,4936 3849.84,4915.16 ; v1(3924,5001) 3902.68,4979.68 3902.68,4915.16 ; V16.GND@3933.86,4115.16 3820.84,4115.16 3784,4152 3784,4475.16 3824,4515.16 3829,4515.16 ; V15.GND@3933.86,4515.16 3829,4515.16 ; V14.GND@3933.86,4915.16 3902.68,4915.16 ; V13.GND@3933.86,5315.16 v1(3792.5,5315.16) 2434.88,5315.16 2422.52,5327.53 2422.52,5329.57 2414.31,5337.78 2240.05,5337.78 2217.43,5315.16 2095.16,5315.16 2087.5,5307.5 TH8.17@2087.5,5253.54 ; TH4.24@3946.46,3387.5 TH4.23@3946.46,3487.5 TH4.22@3946.46,3587.5 TH4.21@3946.46,3687.5 TH4.20@4253.54,3687.5 TH4.19@4253.54,3587.5 TH4.18@4253.54,3487.5 TH4.17@4253.54,3387.5 4212,3387.5 4183,3358.5 4183,2865.31 4190.5,2857.81 4190.5,2834.2 4183,2826.7 4183,2102.5 4153,2072.5 4153,1576 4136,1559 4115.16,1559 V8.GND@4115.16,1541.14 4115.16,1501.84 ; S4.ADDR12@3973.62,330.79 4002.03,330.79 4007.24,336 4007.24,356 4000.96,362.28 ; S4.ADDR13@3973.62,362.28 4000.96,362.28 ; S4.VSS@3973.62,614.25 4028.75,614.25 4056.5,586.5 ; v1(4138,1479) 4115.16,1501.84 ; v1(4396,4948) 4409.5,4961.5 4409.5,5023 4425.5,5039 4523.63,5039 4583.63,5099 4628.96,5099 4657.08,5127.12 4657.08,5241.38 S7.~BLE@4651.77,5241.38 4651.77,5268 4644.77,5275 4627.28,5275 4620.28,5268 ; S4.VSS@4426.38,645.75 4396.25,645.75 4380.5,661.5 4380.5,684.81 4363.81,701.5 4360.5,701.5 4360,702 4278,702 4162.5,586.5 4056.5,586.5 ; S4.~BLE@4426.38,803.23 4456,803.23 4460,807.23 4460,830.72 4456,834.72 ; S4.~BHE@4426.38,834.72 4456,834.72 ; V7.GND@4515.16,1541.14 4515.16,1502 v1(4539,1478.16) ; v1(4549,948.28) 4549,887.72 4496,834.72 4456,834.72 ; v1(4596.28,4510.06) 4620.28,4486.06 4620.28,4476 ; S7.~BHE@4620.28,5241.38 4620.28,5268 ; v1(4626,5341) 4620.28,5335.28 4620.28,5268 ; S8.~BLE@4651.77,4426.38 S8.~BHE@4620.28,4426.38 4620.28,4476 ; v1(4729.07,425.28) 4763,425.28 ; S3.ADDR12@4788.62,330.79 4817.03,330.79 4822.24,336 4822.24,356.04 4816,362.28 ; S3.ADDR13@4788.62,362.28 4816,362.28 ; v1(4795.79,5361) 4809.25,5347.54 S7.VSS@4809.25,5241.38 4809.25,5192.68 4804,5187.43 4804,5135.93 4810,5129.93 4810,4844.74 4840.75,4814 S7.VSS@4840.75,4788.62 ; 4840,4515 4809.25,4484.25 S8.VSS@4809.25,4426.38 ; v1(4840.75,3687.5) 4840.75,3915.25 ; v1(4915,1478) 4915.16,1478.16 4915.16,1512 ; V6.GND@4915.16,1541.14 4915.16,1512 ; 4948,4515 4993,4560 4993,4600 4953,4640 4854,4640 4833,4661 4833,4748 4840.75,4755.75 S7.VSS@4840.75,4788.62 ; S7.ADDR15@5029.72,4788.62 5029.72,4764 v1@5048.42,4745.3 ; v1@5042.24,4735.09 5014.22,4688.8 5014.22,4536 4993.22,4515 4831,4515 4809.25,4493.25 ; v1(5049,4731) v1@5048.42,4745.3 ; v1(5055,1490) 4937.16,1490 4915.16,1512 ; v1@5059.5,896.6 v1(5059.5,963.5) ; S8.ADDR14@5061.22,3973.62 5061.22,4000.46 ; v1(5061.6,896.6) 5151.6,806.6 ; S8.ADDR13@5092.72,3973.62 5092.72,4000 ; S7.ADDR13@5092.72,4788.62 S7.ADDR13@5092.72,4788 ; S8.ADDR12@5124.21,3973.62 5124.21,4003.03 5120,4007.24 5099.96,4007.24 5092.72,4000 ; S7.ADDR12@5124.21,4788.62 5124.21,4788 S7.ADDR13@5092.72,4788 ; S3.~BLE@5241.38,803.23 5270.23,803.23 5275,808 5275,828 5268.28,834.72 S3.~BHE@5241.38,834.72 5211.26,834.72 5176.53,800 5158.19,800 5151.6,806.6 ; TH3.20@5253.54,3687.5 TH3.19@5253.54,3587.5 TH3.18@5253.54,3487.5 TH3.17@5253.54,3387.5 TH3.24@4946.46,3387.5 TH3.23@4946.46,3487.5 TH3.22@4946.46,3587.5 TH3.21@4946.46,3687.5 4857.25,3687.5 4840.75,3704 4840.75,3915.25 ; V5.GND@5315.16,1541.14 5315.16,1478.58 5411,1382.74 5411,727.75 5329,645.75 S3.VSS@5241.38,645.75 5216,645.75 5184.75,677 5169,677 5141,705 5141,787 5136,792 ; 154.84,3991 101,4044.84 101,4725 115,4739 115,4775 149.25,4809.25 S5.VSS@233.62,4809.25 376,4809.25 416,4769.25 416,4743.25 279,4620.28 ; 259,783.79 330.79,712 ; 259,783.79 303.79,739 404.28,739 441.28,776 603,776 614.25,764.75 ; 259,783.79 259,1394.21 ; 259,1394.21 259,1880 299,1920 1528.54,1920 ; 259,1394.21 330.79,1466 S2.ADDR12@330.79,1501.38 S2.ADDR13@362.28,1501.38 S2.ADDR14@393.78,1501.38 S2.ADDR15@425.28,1501.38 425.28,1560 ; 330.79,712 338.79,720 354.28,720 362.28,712 S1.ADDR13@362.28,686.38 362.28,662.54 393.78,662.54 S1.ADDR14@393.78,686.38 393.78,712 401.78,720 417.28,720 425.28,712 ; 394,1787.5 425.28,1756.22 425.28,1560 ; 394,1787.5 TH5.21@528.54,1787.5 TH5.22@528.54,1887.5 TH5.23@528.54,1987.5 528.54,2064 ; 425.28,1560 494.77,1629.5 573.25,1629.5 614.25,1588.5 ; 528.54,2064 805.04,1787.5 TH6.20@1221.46,1787.5 TH6.19@1221.46,1887.5 TH6.18@1221.46,1987.5 TH6.17@1221.46,2087.5 ; 614.25,764.75 614.25,830.25 745,961 ; 614.25,764.75 S1.VSS@614.25,686.38 614.25,661.26 596,643.01 596,459.69 619.64,436.04 619.64,350.86 664,306.5 664,285.5 645.75,267.25 S1.VSS@645.75,233.62 645.75,163.25 665,144 784.5,144 803.23,162.73 803.23,208 ; 660,5092.72 659.54,5061.62 659.54,5061.22 S5.ADDR14@686.38,5061.22 S5.ADDR15@686.38,5029.72 ; S5.ADDR15@686.38,5029.72 760.28,5029.72 774,5016 774,4854.75 760,4840.75 ; 745,961 803.23,1019.23 S2.~BLE@803.23,1048.62 808,1077.47 834.72,1076 ; 760,4840.75 811.92,4840.75 ; 811.92,4840.75 1024,4651.77 ; 918,4571.98 v1(918,4504) 918,4047 919,4046 ; 918,4571.98 997.79,4651.77 1024,4651.77 ; 919,4046 954.84,4010.16 V11.GND@954.84,3933.86 954.84,2104 971.34,2087.5 TH6.17@1221.46,2087.5 ; TH6.17@1221.46,2087.5 TH6.24@1528.54,2087.5 TH6.23@1528.54,1987.5 1528.54,1920 ; 1354.84,4024 V12.GND@1354.84,3933.86 1354.84,4006.84 1380,4032 1471,4032 1479,4040 ; 1354.84,4024 1370.84,4040 1479,4040 ; 1476,5029.72 1476,5061.22 ; 1476,5061.22 1469.4,5083.04 S6.ADDR13@1501.38,5092.72 1472,5096.72 1476,5124.21 S6.ADDR12@1501.38,5124.21 1675,5124.21 1696,5103.21 1696,4500.5 1787.5,4409 TH7.20@1787.5,4253.54 TH7.19@1887.5,4253.54 TH7.18@1987.5,4253.54 ; 1479,4040 1525,4086 1669,4086 ; 1528.54,1920 1589,1920 1630,1961 1630,2374 1560,2444 1490,2444 1475,2459 1475,2520 1500,2545 1666.98,2545 1787.5,2665.52 TH7.21@1787.5,3946.46 ; 1648,154.84 1676,182.84 1676,454 1675,455 ; 1648,154.84 3128.84,154.84 3132,158 3132,923.5 3387.5,1179 TH2.17@3387.5,1221.46 TH2.18@3487.5,1221.46 TH2.19@3587.5,1221.46 TH2.20@3687.5,1221.46 ; 1669,4086 2041.5,4086 2087.5,4040 TH7.24@2087.5,3946.46 ; 1669,4086 1787.5,3967.5 TH7.21@1787.5,3946.46 ; TH7.21@1787.5,3946.46 TH7.22@1887.5,3946.46 TH7.23@1987.5,3946.46 TH7.24@2087.5,3946.46 ; TH7.18@1987.5,4253.54 TH7.17@2087.5,4253.54 TH7.24@2087.5,3946.46 ; TH7.18@1987.5,4253.54 1987.5,4330.5 2029,4372 2029,4859 1987.5,4900.5 TH8.23@1987.5,4946.46 ; TH8.23@1987.5,4946.46 TH8.24@2087.5,4946.46 TH8.17@2087.5,5253.54 ; 3687.5,376 TH3.21@3687.5,528.54 ; 3687.5,376 3705.28,393.78 S4.ADDR14@3973.62,393.78 ; TH3.21@3687.5,528.54 TH2.20@3687.5,1221.46 ; TH2.20@3687.5,1221.46 3687.5,1402.5 ; 3687.5,1402.5 3712,1427 4103.16,1427 4115.16,1439 4115.16,1501.84 ; 3849.84,4915.16 3902.68,4915.16 ; S4.ADDR14@3973.62,393.78 S4.ADDR15@3973.62,425.28 4032,425.28 4084.5,477.78 4084.5,558.5 4056.5,586.5 ; S4.ADDR14@3973.62,393.78 3997.46,393.78 4007.24,384 4007.24,368 4001.53,362.28 4000.96,362.28 ; 4620.28,4476 4623.28,4479 4795,4479 4809.25,4493.25 ; 4763,425.28 4700,488.28 4700,576.7 4683.5,593.2 4683.5,620.68 4696.32,633.5 4723.81,633.5 4740.5,616.81 4740.5,615.5 4741.75,614.25 S3.VSS@4788.62,614.25 4872.25,614.25 4907,649 5008,649 5051.5,692.5 5051.5,707.5 5136,792 ; 4763,425.28 S3.ADDR15@4788.62,425.28 S3.ADDR14@4788.62,393.78 4812.46,393.78 4822.24,384 4822.24,368 4816.53,362.28 4816,362.28 ; S8.VSS@4809.25,4426.38 4809.25,4493.25 ; S8.VSS@4809.25,4426.38 4809.25,4388.26 4796,4375 4796,4303.43 4894,4205.43 4894,4121.09 4854,4081.09 4854,4019.72 4840.75,4006.46 S8.VSS@4840.75,3973.62 4840.75,3915.25 ; 4840.75,3915.25 4876,3880 4973,3880 5029.72,3936.72 S8.ADDR15@5029.72,3973.62 5029.72,4000.97 5036,4007.24 5056,4007.24 5061.22,4002.02 5061.22,4000.46 ; S7.VSS@4840.75,4788.62 4834,4751.75 4834,4664.5 4859,4639.5 4942.62,4639.5 v1@5048.42,4745.3 ; v1@5048.42,4745.3 S7.ADDR14@5061.22,4788.62 5061.22,4788 S7.ADDR13@5092.72,4788 ; 5061.22,4000.46 5068,4007.24 5088,4007.24 5092.72,4002.53 5092.72,4000 ; 5136,792 5150.6,806.6 5151.6,806.6
  Mid-Layer 1 w7: v1(155,4039) 316,4039 337,4018 v1(504.84,4018) ; v1(918,4504) 918,4569.5 976,4627.5 1209.54,4627.5 1240.75,4596.28 1240.75,4536.25 v1(1271,4506) ; v1(954.84,4092.84) 996,4134 1281,4134 v1(1354.84,4060.16) ; v1(1211,903.43) 1217.57,910 v1(1569,910) ; v1(3924,5001) 4311,5001 v1(4334,4978) ; v1(4156,961) 4230.31,961 4285.31,906 4506.72,906 v1(4549,948.28) ; v1(4539,1478.16) 4569.84,1509 4884,1509 v1(4915,1478)
  Mid-Layer 2 w7: v1(1078,1325) 1048,1295 1048,984 1084.5,947.5 v1(1137,947.5) ; v1(1121.02,555.43) 1080.59,515 1049,492 1049,161 1086.57,123.43 v1(1129,123.43) ; v1(1569,910) 1569,577 v1(1675,471) ; v1(3784,4560.16) 3784,4879 v1(3820.16,4915.16) ; v1(3792.5,5315.16) 3792.5,5038.5 v1(3829,5002) ; v1(5055,1490) 5055,1060 5034.81,1039.81 5034.81,988.19 v1(5059.5,963.5)
  Bottom Layer w7: OB9.GND@159.43,4458.86 159.43,4501.26 146.5,4514.2 146.5,4537.81 163.2,4554.5 186.81,4554.5 219.31,4522 260.72,4522 307,4568.28 v1(307,4583) 412.45,4583 424.45,4595 427,4595 556.43,4465.57 OB10.GND@556.43,4458.86 ; v1(425.28,777.93) C1.GND@491.14,777.93 ; v1(504.84,4018) 567.84,3955 879,3955 927,4003 v1(919,4003) ; v1(614.25,1699.75) 702,1787.5 BH3.21@721.46,1787.5 BH3.20@1028.54,1787.5 BH3.19@1028.54,1887.5 ; v1(627,5035) 700.27,4961.73 766.21,4961.73 767.93,4960 C3.GND@767.93,4928.86 ; v1(816,1239.16) 932.28,1355.43 OB4.GND@1016.14,1355.43 1047.57,1355.43 v1(1078,1325) ; v1(872.5,4526.48) 941.24,4526.48 954.43,4513.29 OB11.GND@954.43,4458.86 ; OB1.GND@1016.14,155.43 1033.89,155.43 1060.32,129 1123.43,129 v1(1129,123.43) ; OB2.GND@1016.14,555.43 v1(1121.02,555.43) ; OB3.GND@1016.14,955.43 1046.66,947.5 ; v1(1130.58,847.58) 1130.58,863.58 1090.73,903.43 ; v1(1137,947.5) 1046.66,947.5 ; v1(1211,903.43) 1090.73,903.43 ; v1(1271,4506) 1335.43,4506 1353.43,4488 OB12.GND@1353.43,4458.86 ; v1(1575.75,5078.98) 1620.25,5078.98 1787.5,4911.72 BH4.21@1787.5,4753.54 BH4.20@1787.5,4446.46 ; OB8.GND@4114.57,1016.14 4114.57,1002.43 v1(4156,961) ; v1(4138,1479) 4171,1446 4506.84,1446 v1(4539,1478.16) ; v1(4334,4978) 4395.43,4916.57 4427.43,4916.57 ; v1(4396,4948) 4427.43,4916.57 ; BH2.18@4446.46,3487.5 BH2.19@4446.46,3587.5 BH2.20@4446.46,3687.5 BH2.21@4753.54,3687.5 ; OB14.GND@4458.86,4117.57 4410.43,4117.57 4366,4162 4222,4162 4199,4185 4199,4472 4285,4558 4416,4558 4431,4543 4431,4500.57 OB13.GND@4458.86,4500.57 4497.84,4500.57 4524.04,4526.77 4579.57,4526.77 v1(4596.28,4510.06) ; OB16.GND@4458.86,4916.57 4427.43,4916.57 ; OB15.GND@4458.86,5314.57 4477,5314.57 4523.43,5361 4606.28,5361 ; OB7.GND@4514.57,1016.14 4514.57,982.71 v1@4549,950.22 ; v1(4549,948.28) v1@4549,950.22 ; v1(4626,5341) 4626,5341.28 4606.28,5361 ; C2.GND@4697.07,491.14 4697.07,457.28 v1(4729.07,425.28) ; BH2.22@4753.54,3587.5 BH2.21@4753.54,3687.5 ; v1(4795.79,5361) 4606.28,5361 ; v1(4840.75,3687.5) BH2.21@4753.54,3687.5 ; OB6.GND@4915.57,1016.14 4915.57,986.13 ; C4.GND@4983.86,4697.07 5018.5,4697.07 5049,4727.57 v1(5049,4731) ; v1(5059.5,963.5) 4938.19,963.5 4915.57,986.13 ; v1(5061.6,896.6) 5090.5,896.6 5115.4,921.5 5129.81,921.5 5147.81,939.5 5149.28,939.5 5153.5,943.72 5153.5,951.81 5174.7,973 5292.57,973 5307.57,988 OB5.GND@5307.57,1016.14 ; 1046.66,947.5 1090.73,903.43 ; v1@4549,950.22 4676.81,950.22 4693.5,933.52 4693.5,909.91 4710.2,893.22 4733.81,893.22 4750.5,909.91 4750.5,933.52 4742.94,941.08 4763.19,941.08 4772.32,950.22 4879.65,950.22 4915.57,986.13
INSIDE_B0: TH8.40 V14.IVCC0 ZIF.1 | length 3024.4
  Top Layer w7: ZIF.1@2737.5,3237.5 2773.65,3273.65 2773.65,3301.35 2821,3348.7 2821,4040.5 2760,4101.5 2737.5,4101.5 2804,4168 3694,4168 3739,4213 3739,4685 3687.5,4736.5 3687.5,4755.34 ; TH8.40@3687.5,4946.46 3687.5,4755.34 ; V14.IVCC0@3933.86,4684.84 3758,4684.84 3687.5,4755.34
INSIDE_B1: TH8.39 V14.IVCC1 ZIF.2 | length 4040.5
  Top Layer w7: TH8.39@3587.5,4946.46 3587.5,5013.5 v1(3595,5021) ; V14.IVCC1@3933.86,4736.02 3988.42,4736.02 v1(3996.42,4728.02)
  Mid-Layer 2 w7: ZIF.2@2637.5,3237.5 2726,3326 2948,3326 2993,3281 2993,3121 3021,3093 3267,3093 3293,3119 3293,3372 3860,3939 3924,4003 3924,4363 ; v1(3595,5021) 3654,4962 3654,4312 3678,4288 3824,4288 3842,4306 3842,4369 3857,4384 3903,4384 3924,4363 ; v1(3996.42,4728.02) 3988.42,4728.02 3924,4663.61 3924,4363
INSIDE_B2: TH8.38 V14.IVCC2 ZIF.3 | length 3206.5
  Top Layer w7: v1(3487.5,4872) TH8.38@3487.5,4946.46 ; v1(3855,4762) 3855.39,4761.61 V14.IVCC2@3933.86,4761.61
  Mid-Layer 1 w7: ZIF.3@2537.5,3237.5 2609,3309 3184,3309 3955,4080 4050,4080 4069,4099 4069,4548 v1(3855,4762) 3597.5,4762 v1(3487.5,4872)
INSIDE_B3: TH8.37 V14.IVCC3 ZIF.4 | length 3833.6
  Top Layer w7: v1(3234,5165) 3387.5,5011.5 ; TH8.37@3387.5,4946.46 3387.5,5011.5 ; v1(3387.5,5087) 3387.5,5011.5 ; V14.IVCC3@3933.86,4787.2 4023.2,4787.2 v1(4031,4795)
  Mid-Layer 1 w7: v1(3387.5,5087) 3522.74,4951.76 3827.24,4951.76 3984,4795 v1(4031,4795)
  Mid-Layer 2 w7: ZIF.4@2437.5,3237.5 2468,3268 2468,4067.57 2684.83,4284.39 2747.77,4284.39 2834,4370.62 2834,4575 2818,4591 2818,4793 2825,4800 2825,5172 2853,5200 3117,5200 3134,5183 3134,5157 3145,5146 3215,5146 v1(3234,5165)
INSIDE_B4: TH8.36 V14.IVCC4 ZIF.5 | length 3465.8
  Top Layer w7: v1(3279.5,4830) 3287.5,4838 TH8.36@3287.5,4927 ; TH8.36@3287.5,4946.46 TH8.36@3287.5,4927 ; v1(3337.25,4877.25) TH8.36@3287.5,4927 ; v1(3829,4829) 3845.2,4812.8 V14.IVCC4@3933.86,4812.8
  Mid-Layer 1 w7: ZIF.5@2337.5,3237.5 2245,3330 2245,3947 2159,4033 2324,4198 2336,4718 3167.5,4718 v1(3279.5,4830) ; v1(3337.25,4877.25) 3385,4925 3733,4925 v1(3829,4829)
INSIDE_B5: TH8.35 V14.IVCC5 ZIF.6 | length 3992.3
  Top Layer w7: v1(3163.5,5175.5) 3187.5,5151.5 v1(3187.5,5113) TH8.35@3187.5,4946.46 ; V14.IVCC5@3933.86,4838.39 3980.39,4838.39 v1(3996,4854)
  Mid-Layer 1 w7: v1(3187.5,5113) 3194.5,5120 3628,5120 3777,4971 3879,4971 v1(3996,4854)
  Mid-Layer 2 w7: ZIF.6@2237.5,3237.5 2320,3320 2320,3464 2237.5,3546.5 2237.5,3979.11 2637,4378.61 2637,5192 2669.5,5224.5 3139.27,5224.5 3163.5,5200.27 v1(3163.5,5175.5)